# EAGLE board PCB-board-v1.2 (EAGLE 9.2.0)
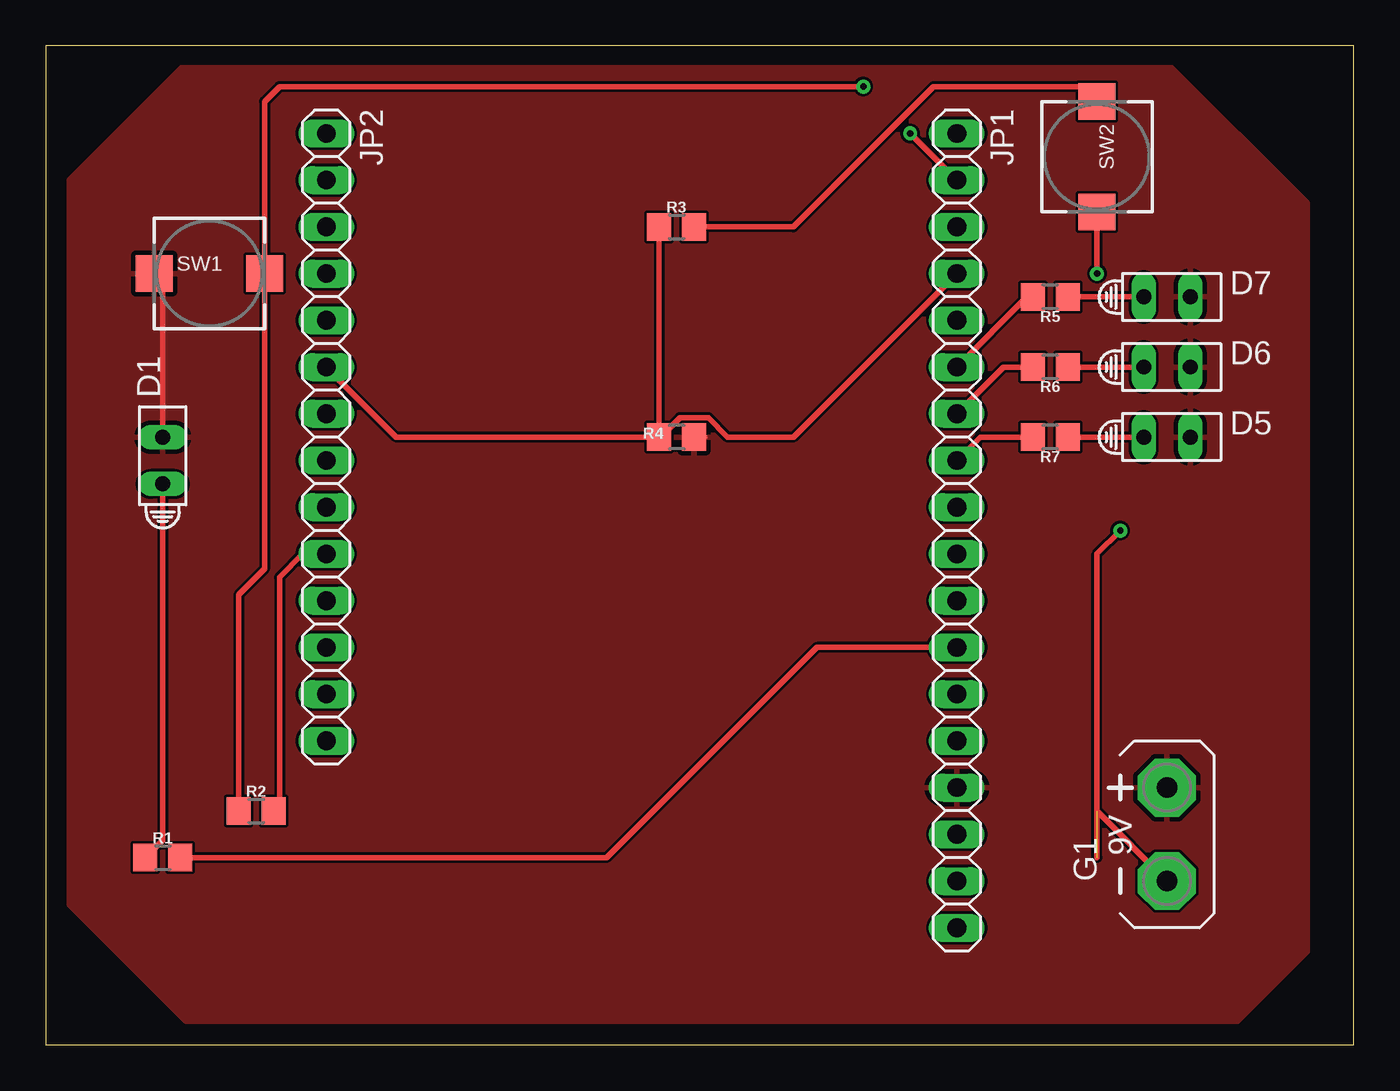
[diagram p0: board, top side]
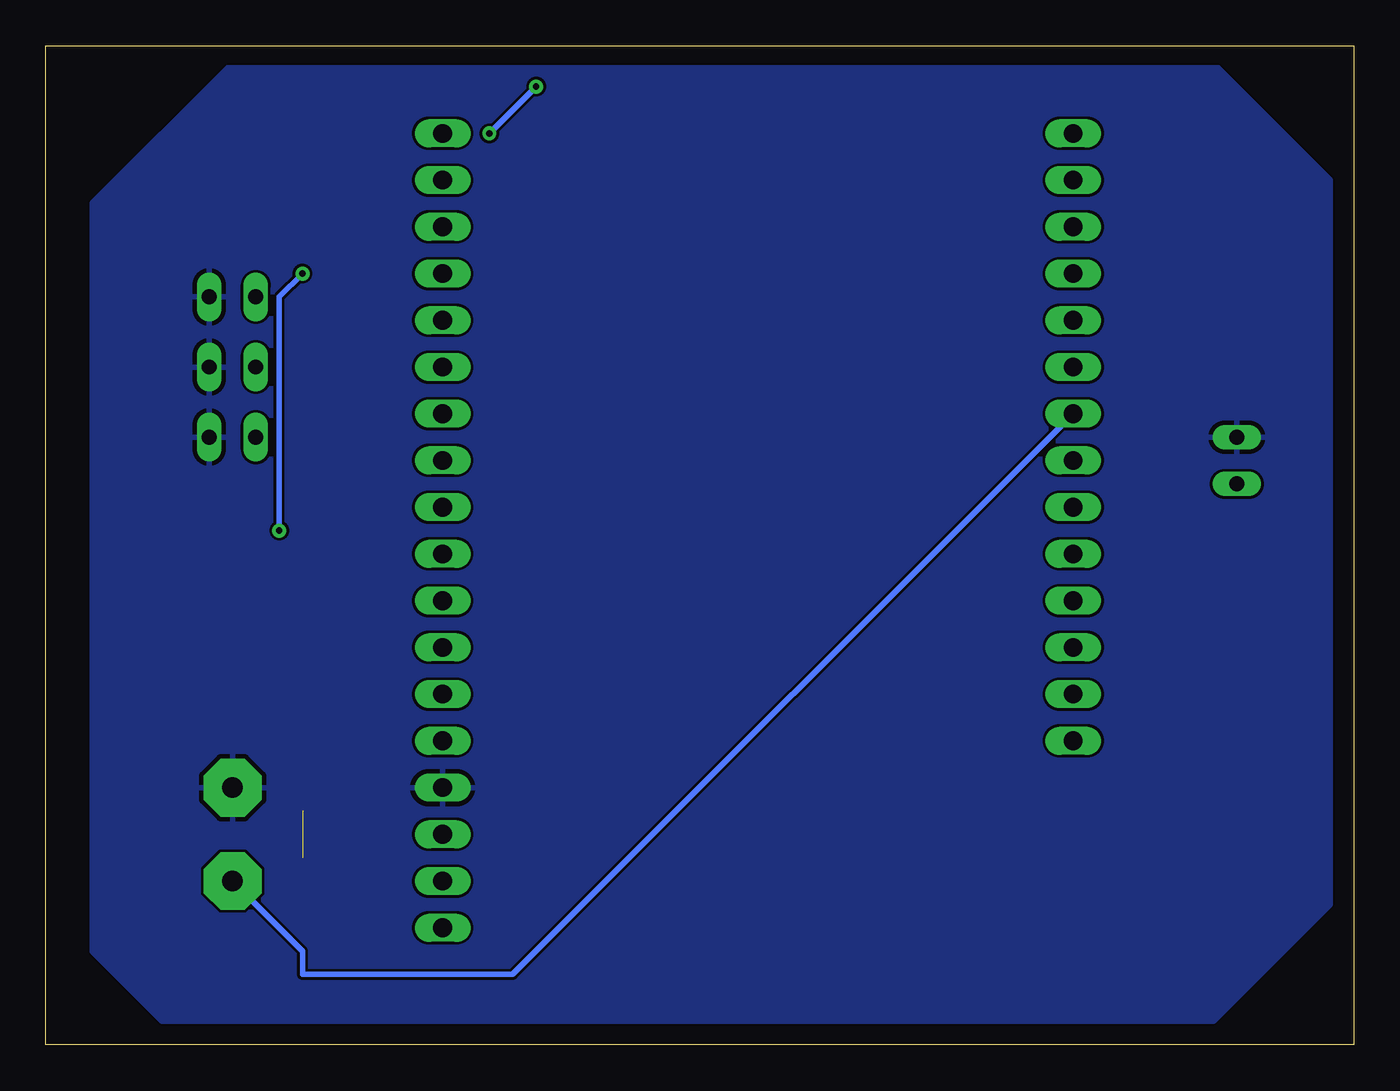
[diagram p1: board, bottom side, seen from below]

Size 71.1 x 54.28 mm. Coordinates in mm from the lower left corner, seen from the top.
Outline: 0,0 71.1,0 71.1,54.28 0,54.28 0,0
Copper layers (1*16): Top 0.035mm / dielectric 1.5mm / Bottom 0.035mm
Design rules "default": minimum track width 6mil, minimum drill 0.35mm, track to track 6mil, track to pad 6mil, pad to pad 6mil, via to via 6mil, smd to smd 6mil, copper to edge 40mil, drill to drill 6mil, minimum pad ring 10mil, minimum via ring 8mil, stop-mask expansion 4mil, vias tented up to drill 0mil, thermal gap 10mil

## Footprints (pad centres in the part's own frame; a part is rotated, then mirrored left to right if it is on the bottom)
HLMP6 = drill 0.813 long: A -1.27,0; K 1.27,0
AB9V = drill 1.118 pad 3.15 octagon: + 0,2.54; - 0,-2.54
1X18 = drill 1.016 long: 1 -21.59,0; 2 -19.05,0; 3 -16.51,0; 4 -13.97,0; 5 -11.43,0; 6 -8.89,0; 7 -6.35,0; 8 -3.81,0; 9 -1.27,0; 10 1.27,0; 11 3.81,0; 12 6.35,0; 13 8.89,0; 14 11.43,0; 15 13.97,0; 16 16.51,0; 17 19.05,0; 18 21.59,0
1X14 = drill 1.016 long: 1 -16.51,0; 2 -13.97,0; 3 -11.43,0; 4 -8.89,0; 5 -6.35,0; 6 -3.81,0; 7 -1.27,0; 8 1.27,0; 9 3.81,0; 10 6.35,0; 11 8.89,0; 12 11.43,0; 13 13.97,0; 14 16.51,0
R0805 = smd 1.3 x 1.5: 1 -0.95,0; 2 0.95,0
PUSHBUTTON_SMD_SJ = smd 2 x 2: P$1 3,0; P$2 -3,0

## Placement (x,y rotation side)
D1  HLMP6  [HLMP6]  6.35,31.75 90 top
D5  HLMP6  [HLMP6]  60.96,33.02 0 top
D6  HLMP6  [HLMP6]  60.96,36.83 0 top
D7  HLMP6  [HLMP6]  60.96,40.64 0 top
G1  AB9V  [AB9V]  60.96,11.43 0 top
JP1  [1X18]  49.53,27.94 270 top
JP2  [1X14]  15.24,33.02 270 top
R1  10k  [R0805]  6.35,10.16 0 top
R2  10k  [R0805]  11.43,12.7 0 top
R3  10k  [R0805]  34.29,44.45 0 top
R4  10k  [R0805]  34.29,33.02 180 top
R5  10k  [R0805]  54.61,40.64 180 top
R6  10k  [R0805]  54.61,36.83 180 top
R7  10k  [R0805]  54.61,33.02 180 top
SW1  [PUSHBUTTON_SMD_SJ]  8.89,41.91 0 top
SW2  [PUSHBUTTON_SMD_SJ]  57.15,48.26 270 top

## Library data of the parts
D1 D5-D7 = display-hp; MF: AGILENT TECHNOLOGIES; MPN: HLMP-6500; OC_FARNELL: 1652490; OC_NEWARK: 40K0088
G1 = battery
JP1 JP2 SW1 SW2 = adafruit
R1-R7 = rcl; SPICEPREFIX: R

## Nets
GND: D1.K D5.K D6.K D7.K G1.+ JP1.15 R4.1 SW1.P$2
N$1: G1.- JP2.7 SW2.P$1
N$2: JP1.12 R1.2
N$3: D1.A R1.1
N$4: D5.A R7.1
N$5: JP1.2 R2.1 SW1.P$1
N$6: R3.2 SW2.P$2
N$7: D6.A R6.1
N$8: JP1.6 R5.2
N$9: D7.A R5.1
N$10: JP1.7 R6.2
N$11: JP1.8 R7.2
N$13: JP1.4 JP2.6 R3.1 R4.2
N$14: JP2.10 R2.2

## Tracks (layer width: path | path; a pad name or v marks a point on that pad's centre or on a via)
GND
  Top 0.305: D1.K 6.35,41.45 SW1.P$2 | 35.83,33.02 R4.1
  pour Top: 1.27,46.99 7.62,53.34 60.96,53.34 68.58,45.72 68.58,5.08 64.77,1.27 7.62,1.27 1.27,7.62
  pour Bottom: 1.27,46.99 7.62,53.34 60.96,53.34 68.58,45.72 68.58,5.08 64.77,1.27 7.62,1.27 1.27,7.62
N$1  (via drill 0.35)  (1 unrouted)
  Top 0.305: G1.- 57.15,12.7 | 57.15,10.16 57.15,26.67 v58.42,27.94 | SW2.P$1 v57.15,41.91
  Bottom 0.305: JP2.7 45.72,3.81 57.15,3.81 57.15,5.08 G1.- | v58.42,27.94 58.42,40.64 v57.15,41.91
N$2
  Top 0.305: R1.2 30.48,10.16 41.91,21.59 JP1.12
N$3
  Top 0.305: R1.1 6.35,11.11 D1.A
N$4
  Top 0.305: D5.A R7.1
N$5  (via drill 0.35)
  Top 0.152: 10.48,13.02 R2.1
  Top 0.305: R2.1 10.48,24.45 11.89,25.86 SW1.P$1 11.89,51.26 12.7,52.07 v44.45,52.07 | v46.99,49.53 JP1.2
  Bottom 0.305: v46.99,49.53 v44.45,52.07
N$6
  Top 0.305: SW2.P$2 56.34,52.07 48.26,52.07 40.64,44.45 R3.2
N$7
  Top 0.305: D6.A R6.1
N$8
  Top 0.305: JP1.6 53.34,40.64 R5.2
N$9
  Top 0.305: D7.A R5.1
N$10
  Top 0.305: JP1.7 52.07,36.83 R6.2
N$11
  Top 0.305: JP1.8 50.8,33.02 R7.2
N$13
  Top 0.305: R4.2 19.05,33.02 JP2.6 | R3.1 R4.2 | JP1.4 40.64,33.02 37.07,33.02 36.02,34.08 34.46,34.08 33.41,33.02 R4.2
N$14
  Top 0.305: R2.2 12.7,13.02 12.7,25.4 13.97,26.67 JP2.10